# Allegro board STM8S_PINOUT.brd
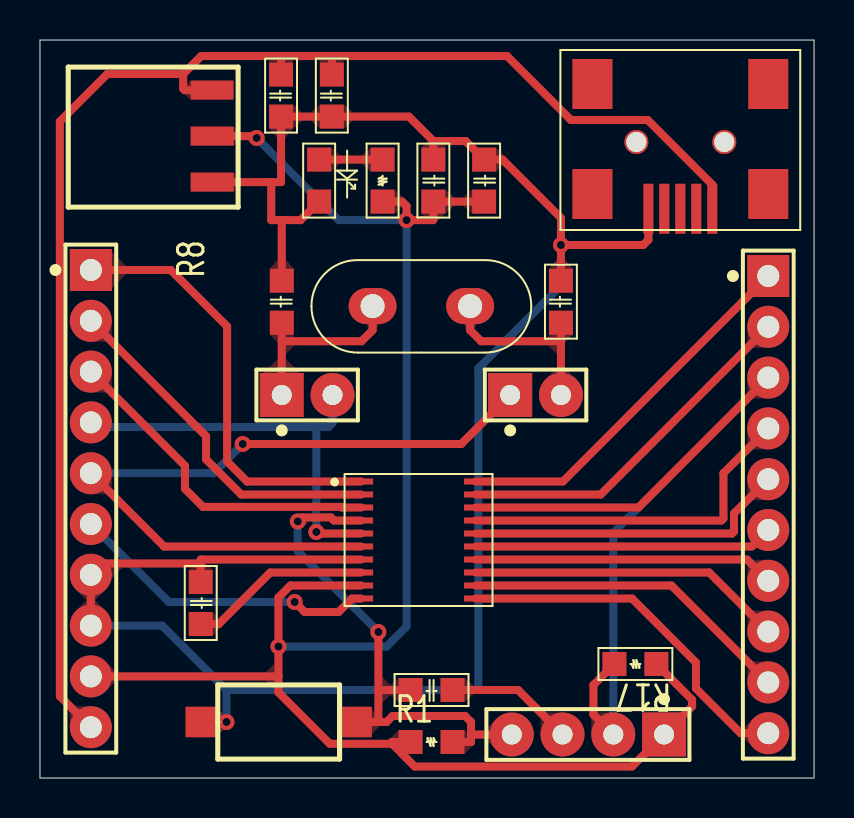
[diagram p0: board, top side]
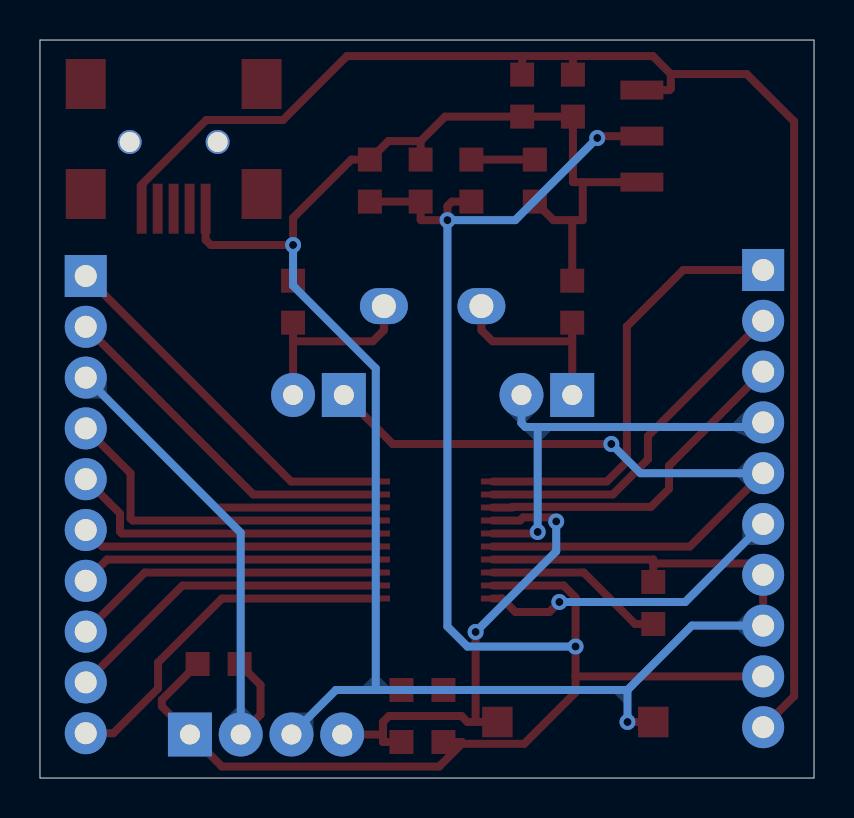
[diagram p1: board, bottom side, seen from below]

Outline 38.73 x 36.9 mm; copper layers: TOP, BOTTOM. Coordinates in mm from the lower left corner of the outline.
Outline path: 0,36.9 0,0 38.73,0 38.73,36.9 0,36.9

## Design rules (mm)
constraint set DEFAULT: min track width 0.4

## Placement (name value [footprint] x y rotation side)
C1  10nF  [CAP_SMD_0805]  18.55 4.4 0 top
C7  1uF  [CAP_SMD_0805]  8.05 7.7 90 top
C11  100nF  [CAP_SMD_0805]  19.69 28.82 90 top
C12  1uF  [CAP_SMD_0805]  22.22 28.82 90 top
C13  100nF  [CAP_SMD_0805]  14.61 35.17 270 top
C14  1uF  [CAP_SMD_0805]  12.06 35.17 270 top
C20  20pF  [CAP_SMD_0805]  12.1 24.87 270 top
C21  20pF  [CAP_SMD_0805]  26.07 24.87 270 top
J1  SWIM  [J1_4_254]  31.23 2.18 180 top
J2  CON2  [J1_2_254]  12.1 19.15 0 top
J3  CON2  [J1_2_254]  23.53 19.15 0 top
J4  CON10  [J1_10_254]  36.45 25.1 270 top
J5  CON10  [J1_10_254]  2.55 25.4 270 top
LD1  LED  [LED_SMD_0805]  13.97 28.82 90 top
R1  10k  [RES_SMD_0805]  18.55 1.8 0 top
R8  1K  [RES_SMD_0805]  17.15 28.82 90 top
R17  1K  [RES_SMD_0805]  30.84 5.7 180 top
SW1  Reset  [SMD_2PIN_BUTTON]  11.95 2.8 0 top
U1  stm8s003f3p6-TSSOP20  [TSSOP20]  18.95 11.9 270 top
U3  ASM1117-SOT223  [SOT223]  5.72 32 90 top
U4  mini USB  [MINI_USB]  32.04 31.8 180 top
Y1  8MHz  [CRYSTAL_HC49_DIP]  19.09 23.6 180 top

## Library data of the parts
C1 C11 C13 = CAP NP
C7 C12 C14 = CAP_0
C20 C21 = CAPACITOR NON-POL
J1 = CON4
J2 J3 = CON2
J4 J5 = CON10
LD1 = LED
R1 R8 R17 = R
SW1 = SW TACT-SPST/SM
U1 = stm8s003f3p6-TSSOP20
U3 = ASM1117-SOT223_0
U4 = mini USB_0
Y1 = CRYSTAL

## Footprints (pads in the part's own frame, mm; a bottom-side part is the same pattern mirrored in y, then rotated)
CAP_SMD_0805
  rect 1.2x1.2 smd: 1(0,0) 2(2.1,0)
CRYSTAL_HC49_DIP
  oval 2.4x1.8 hole 1.2: 1(-2.44,0) 2(2.44,0)
J1_2_254
  rect 2.2x2.2 hole 1: 1(0,0)
  round 2.2 hole 1: 2(2.54,0)
J1_4_254
  rect 2.2x2.2 hole 1: 1(0,0)
  round 2.2 hole 1: 2(2.54,0) 3(5.08,0) 4(7.62,0)
J1_10_254
  rect 2.1x2.1 hole 1.1: 1(0,0)
  round 2.1 hole 1.1: 2(2.54,0) 3(5.08,0) 4(7.62,0) 5(10.16,0) 6(12.7,0) 7(15.24,0) 8(17.78,0) 9(20.32,0) 10(22.86,0)
LED_SMD_0805
  rect 1.2x1.2 smd: 1(0,0) 2(2.1,0)
MINI_USB
  rect 0.5x2.5 smd: 1(-1.6,3.336) 2(-0.8,3.336) 3(0,3.336) 4(0.8,3.336) 5(1.6,3.336)
  rect 2x2.5 smd: 6(4.4,2.6) 7(-4.4,2.6) 8(-4.4,-2.9) 9(4.4,-2.9)
  round 1.2 hole 1: 10(2.2,0) 11(-2.2,0)
RES_SMD_0805
  rect 1.2x1.2 smd: 1(0,0) 2(2.1,0)
SMD_2PIN_BUTTON
  rect 1.524x1.524 smd: 1(-3.9,0) 2(3.9,0)
SOT223
  rect 0.95x2.15 smd: 1(-2.201,-2.901) 2(0.099,-2.901) 3(2.399,-2.901)
TSSOP20
  rect 0.3x1.2 smd: 1(-2.925,-2.875) 2(-2.275,-2.875) 3(-1.625,-2.875) 4(-0.975,-2.875) 5(-0.325,-2.875) 6(0.325,-2.875) 7(0.975,-2.875) 8(1.625,-2.875) 9(2.275,-2.875) 10(2.925,-2.875) 11(2.925,2.875) 12(2.275,2.875) 13(1.625,2.875) 14(0.975,2.875) 15(0.325,2.875) 16(-0.325,2.875) 17(-0.975,2.875) 18(-1.625,2.875) 19(-2.275,2.875) 20(-2.925,2.875)

## Nets
3V3: C11.1 C12.1 J1.1 J5.9 R1.1 R8.1 R17.1 U1.9 U3.2(VOUT)
5V: C13.1 C14.1 J5.10 U3.3 U4.1(VCC)
GND: C1.2 C7.2 C11.2 C12.2 C13.2 C14.2 C20.1 C21.1 J1.3 J5.7 J5.8 LD1.1(CATHODE) SW1.1 U1.7 U3.1 U4.5
OSC1: J2.2 J5.4 U1.5
OSC2: J3.1 J5.5 U1.6
PA3: J5.6 U1.10([SPI_NSS]TIM2_CH3[HS]/PA3)
PB4: J4.9 U1.12
PB5: J4.10 U1.11
PC3: J4.8 U1.13
PC4: J4.7 U1.14
PC5: J4.6 U1.15
PC6: J4.5 U1.16
PC7: J4.4 U1.17
PD1: J1.2 J4.3 R17.2 U1.18
PD3: J4.1 U1.20
PD4: J5.1 U1.1
PD5: J5.2 U1.2
PD6: J5.3 U1.3
RESET: C1.1 J1.4 R1.2 SW1.2 U1.4
N71205: C7.1 U1.8
N140371: C20.2 J2.1 Y1.2
N140397: C21.2 J3.2 Y1.1
N142589: J4.2 U1.19
N1418901: LD1.2 R8.2

Pads without a net: U4 2 3 4 6 7 8 9 10 11

## Via types
v1: diameter 0.8, hole 0.4, TOP to BOTTOM, 10 vias

## Routing (per net, layer and track width the routed paths; a pad name or vN(x,y) marks a point on that pad's centre or on a via; arc(x,y) is an arc through that point)
3V3: length 91.3
  TOP w0.4: 16.07,9.62 12.53,9.62 11.93,9.03 v1(11.93,6.57) 11.93,5.08 ; 17.62,1.71 17.62,1.8 R1.1 ; 17.62,1.71 18.75,0.58 29.63,0.58 J1.1 32.63,3.58 32.63,3.91 R17.1 ; 17.62,1.71 14.5,1.71 11.93,4.28 11.93,5.08 ; 11.93,5.08 J5.9 ; R8.1 18.12,28.82 18.34,28.6 v1(18.34,27.89) 19.66,27.89 19.69,27.92 C11.1 C12.1 ; v1(10.84,32) 10.75,32.09 U3.2
  BOTTOM w0.4: v1(10.84,32) 14.95,27.89 v1(18.34,27.89) 18.34,7.57 17.34,6.57 v1(11.93,6.57)
5V: length 72.9
  TOP w0.4: 7.17,35.2 8.07,36.1 12.06,36.1 ; 7.17,35.2 7.17,34.47 7.24,34.39 U3.3 ; 7.17,35.2 3.37,35.2 0.99,32.83 0.99,4.09 J5.10 ; 14.61,36.1 12.06,36.1 ; 14.61,36.1 C13.1 ; 14.61,36.1 23.37,36.1 26.57,32.9 30.41,32.9 33.65,29.67 U4.1 ; 12.06,36.1 C14.1
GND: length 117.2
  TOP w0.4: 12.1,27.89 13.04,27.89 LD1.1 ; 12.1,27.89 11.57,27.89 11.57,29.79 ; 12.1,27.89 C20.1 ; U4.5 30.45,26.91 30.19,26.65 v1(26.07,26.65) ; C11.2 19.69,31.85 ; 19.69,31.85 18.46,33.07 C13.2 C14.2 12.06,29.79 11.57,29.79 ; 19.69,31.85 21.3,31.85 C12.2 23.15,30.92 26.07,28 v1(26.07,26.65) ; 8.05,10.73 3.11,10.73 J5.7 J5.8 ; 8.05,10.73 8.05,10.93 U1.7 ; 8.05,10.73 C7.2 ; J1.3 23.92,4.4 C1.2 ; 11.57,29.79 U3.1 ; C21.1 v1(26.07,26.65) ; SW1.1 v1(9.33,2.8)
  BOTTOM w0.4: 21.93,4.4 23.92,4.4 J1.3 ; 21.93,4.4 21.93,20.48 26.07,24.62 v1(26.07,26.65) ; 21.93,4.4 9.33,4.4 ; 9.33,4.4 6.11,7.62 J5.8 ; 9.33,4.4 v1(9.33,2.8)
OSC1: length 21.2
  TOP w0.4: v1(13.83,12.3) 13.91,12.23 U1.5
  BOTTOM w0.4: J5.4 2.78,17.55 13.83,17.55 ; J2.2 14.64,17.75 14.44,17.55 13.83,17.55 ; 13.83,17.55 v1(13.83,12.3)
OSC2: length 37.6
  TOP w0.4: J5.5 6.21,11.58 U1.6 ; J3.1 21.08,16.7 v1(10.15,16.7)
  BOTTOM w0.4: J5.5 8.69,15.24 v1(10.15,16.7)
PA3: length 15.6
  TOP w0.4: v1(12.75,8.8) 13.24,8.3 14.95,8.3 15.62,8.98 U1.10
  BOTTOM w0.4: J5.6 6.45,8.8 v1(12.75,8.8)
PB4: length 16.6
  TOP w0.4: J4.9 31.6,9.62 21.82,9.62
PB5: length 18.2
  TOP w0.4: U1.11 29.63,8.98 32.83,5.78 32.83,4.48 35.06,2.24 J4.10
PC3: length 15.8
  TOP w0.4: U1.13 33.49,10.28 J4.8
PC4: length 15.1
  TOP w0.4: U1.14 35.38,10.93 J4.7
PC5: length 15
  TOP w0.4: J4.6 35.62,11.58 U1.15
PC6: length 16.3
  TOP w0.4: J4.5 34.73,13.23 34.73,12.33 34.63,12.23 U1.16
PC7: length 17.9
  TOP w0.4: U1.17 34.1,12.88 34.2,12.98 34.2,15.24 J4.4
PD1: length 42.7
  TOP w0.4: U1.18 29.95,13.53 J4.3 ; R17.2 27.7,4.65 27.7,3.17 J1.2
  BOTTOM w0.4: J4.3 28.69,12.27 J1.2
PD3: length 18.9
  TOP w0.4: J4.1 26.17,14.83 U1.20
PD4: length 21.9
  TOP w0.4: U1.1 10.37,14.83 9.37,15.83 9.37,22.58 6.55,25.4 J5.1
PD5: length 17.8
  TOP w0.4: U1.2 10.07,14.18 8.31,15.93 8.31,17.09 J5.2
PD6: length 17
  TOP w0.4: J5.3 7.26,15.61 7.26,14.46 8.16,13.56 15.08,13.56 15.11,13.53 U1.3
RESET: length 26.6
  TOP w0.4: 21.57,2.18 21.57,1.8 R1.2 ; 21.57,2.18 21.57,2.8 21.27,3.1 17.65,3.1 17.35,2.8 16.93,2.8 ; 21.57,2.18 J1.4 ; 16.93,2.8 16.93,4.4 ; 16.93,2.8 SW1.2 ; 16.93,4.4 C1.1 ; 16.93,4.4 v1(16.93,7.3) ; v1(12.9,12.83) 13.1,13.03 14.56,13.03 14.71,12.88 U1.4
  BOTTOM w0.4: v1(12.9,12.83) 12.9,11.33 v1(16.93,7.3)
N71205: length 9.1
  TOP w0.4: U1.8 11.52,10.28 8.95,7.7 C7.1
N140371: length 9.6
  TOP w0.4: 12.1,21.84 16.09,21.84 16.65,22.39 Y1.2 ; 12.1,21.84 J2.1 ; 12.1,21.84 C20.2
N140397: length 9.6
  TOP w0.4: J3.2 26.07,21.84 ; 26.07,21.84 C21.2 ; 26.07,21.84 22.08,21.84 21.53,22.39 Y1.1
N142589: length 18.1
  TOP w0.4: U1.19 28.06,14.18 J4.2
N1418901: length 3.2
  TOP w0.4: R8.2 LD1.2

Small or netless copper shapes (teardrops, artwork), in the pictures only: 75 on TOP, 22 on BOTTOM
